# EAGLE board SirenController (EAGLE 7.1.0)
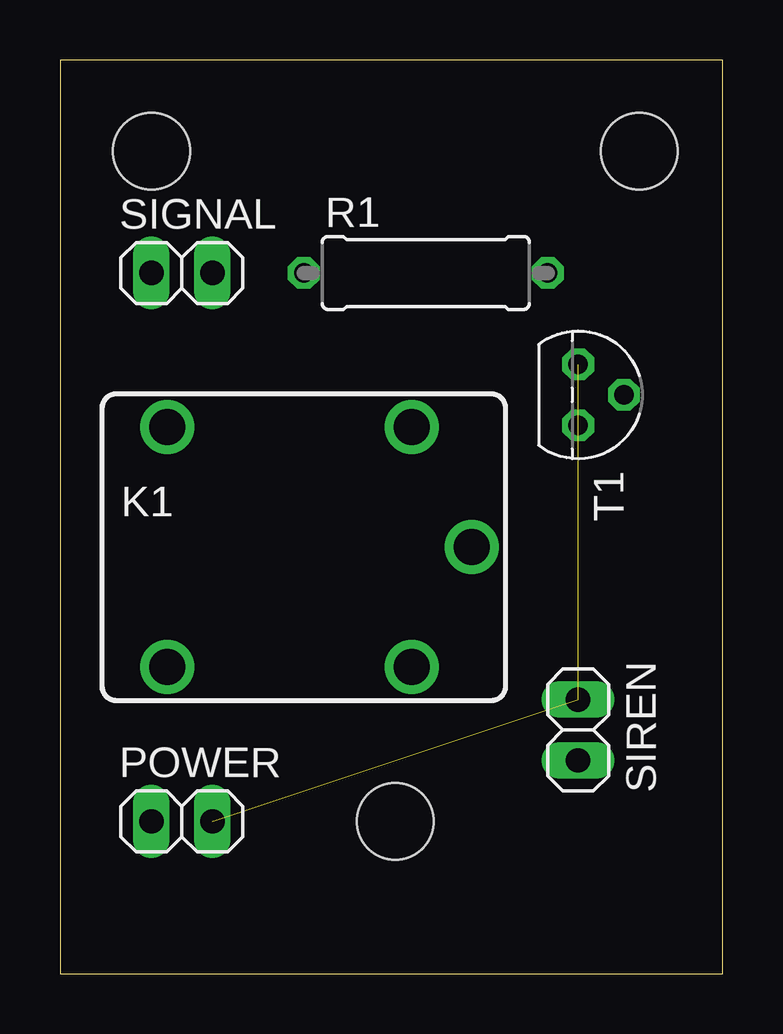
[diagram p0: board, top side]
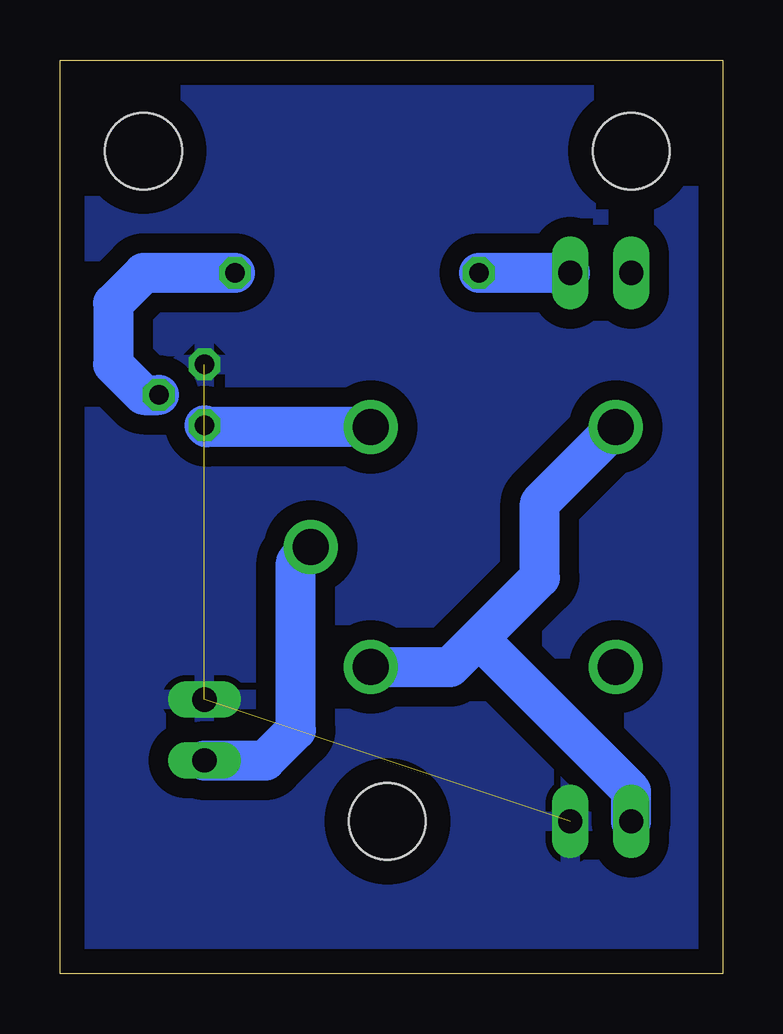
[diagram p1: board, bottom side, seen from below]

Size 27.61 x 38.09 mm. Coordinates in mm from the lower left corner, seen from the top.
Outline: 0,0 27.61,0 27.61,38.09 0,38.09 0,0
Copper layers (1*16): Top 0.035mm / dielectric 1.5mm / Bottom 0.035mm
Design rules "default": minimum track width 10mil, minimum drill 24mil, track to track 8mil, track to pad 8mil, pad to pad 8mil, via to via 8mil, smd to smd 8mil, copper to edge 40mil, drill to drill 8mil, minimum pad ring 10mil, minimum via ring 8mil, stop-mask expansion 4mil, vias tented up to drill 0mil, thermal gap 10mil
Holes 3.2 mm at 3.81,34.29 24.13,34.29 13.97,6.35

## Footprints (pad centres in the part's own frame; a part is rotated, then mirrored left to right if it is on the bottom)
CQ1 = drill 1.5: 1 4.5,-5; 2 4.5,5; C 7,0; NC -5.7,-5; NO -5.7,5
1X02 = drill 1.016 long: 1 -1.27,0; 2 1.27,0
0309/10 = drill 0.813 octagon: 1 -5.08,0; 2 5.08,0
TO92 = drill 0.813 octagon: 1 1.27,0; 2 0,1.905; 3 -1.27,0

## Placement (x,y rotation side)
K1  CQ1-5V  [CQ1]  10.16,17.78 0 top
POWER  [1X02]  5.08,6.35 0 top
R1  [0309/10]  15.24,29.21 0 top
SIGNAL  [1X02]  5.08,29.21 0 top
SIREN  [1X02]  21.59,10.16 90 top
T1  2N3904  [TO92]  21.59,24.13 270 top

## Library data of the parts
K1 = relay; OC_FARNELL: unknown; OC_NEWARK: unknown
POWER SIGNAL SIREN = pinhead
R1 = rcl
T1 = transistor

## Nets
GND: POWER.2 SIREN.2 T1.3
N$1: K1.C SIREN.1
N$2: K1.1 K1.NO POWER.1
N$3: K1.2 T1.1
N$4: R1.1 SIGNAL.2
N$5: R1.2 T1.2

## Tracks (layer width: path | path; a pad name or v marks a point on that pad's centre or on a via)
GND  (2 unrouted)
  pour Bottom (isolate 0.813): 0,38.1 27.94,38.1 27.94,0 0,0
N$1
  Bottom 1.676: SIREN.1 19.05,8.89 17.78,10.16 17.78,17.16 K1.C
N$2
  Bottom 1.676: K1.1 11.35,12.78 10.16,13.97 | 10.16,13.97 7.62,16.51 7.62,19.62 K1.NO | POWER.1 3.81,7.62 10.16,13.97
N$3
  Bottom 1.676: K1.2 21.51,22.78 T1.1
N$4
  Bottom 1.676: SIGNAL.2 R1.1
N$5
  Bottom 1.676: R1.2 24.13,29.21 25.4,27.94 25.4,25.4 24.13,24.13 T1.2